# EAGLE board ADC Board (EAGLE 7.6.0)
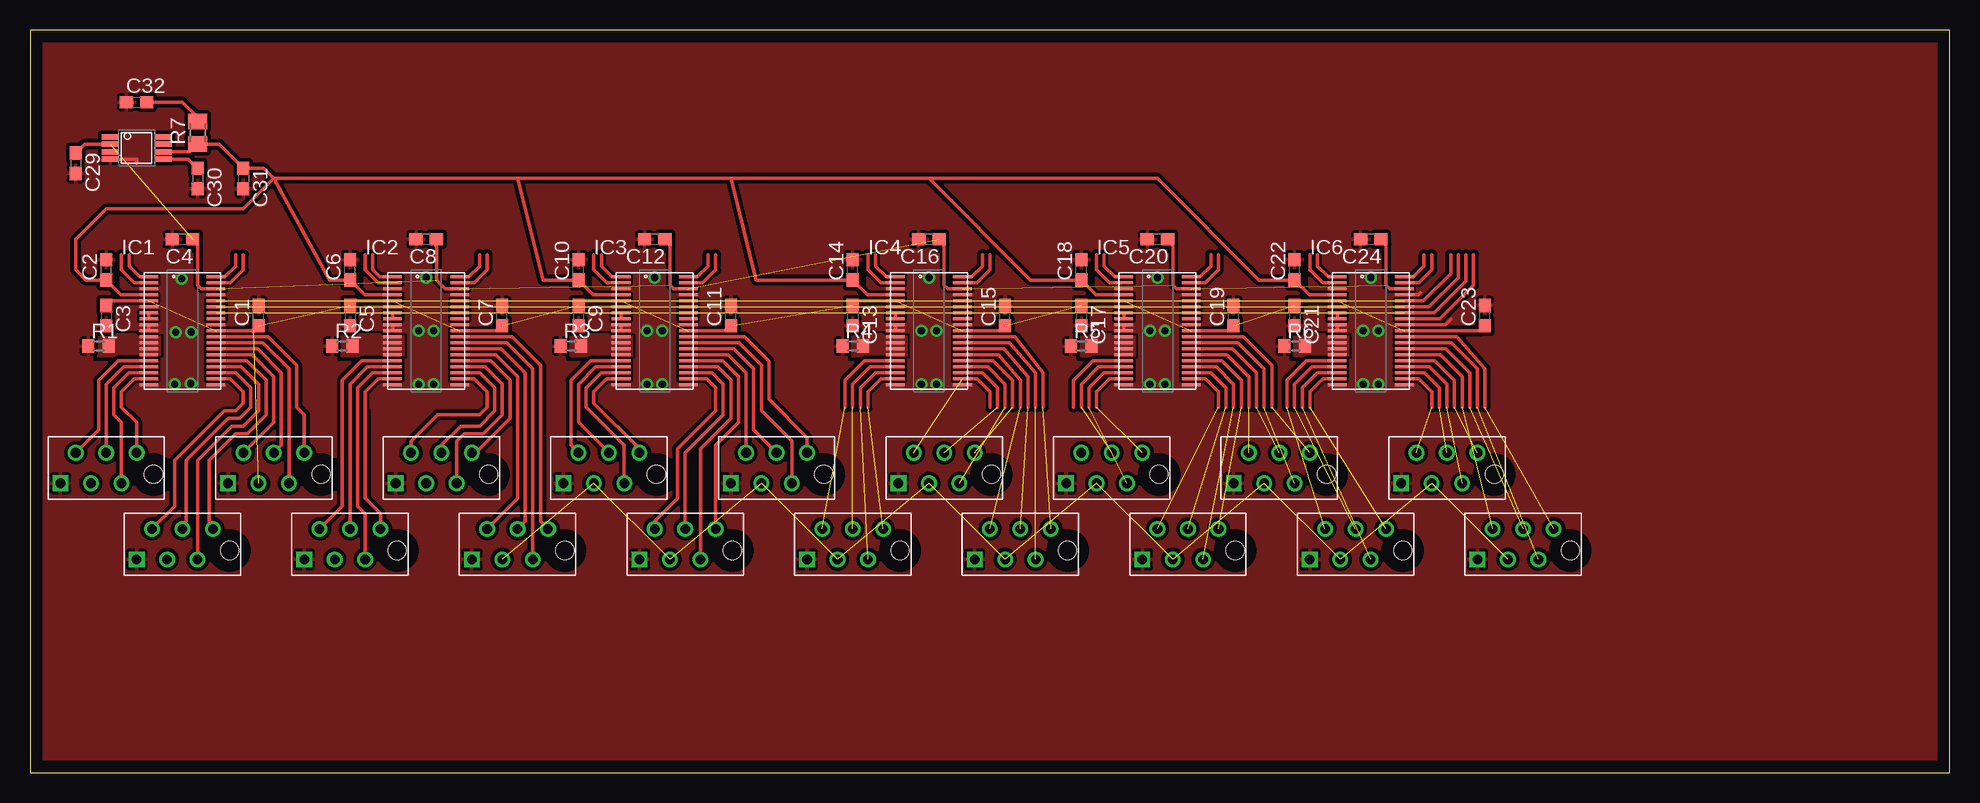
[diagram p0: board, top side]
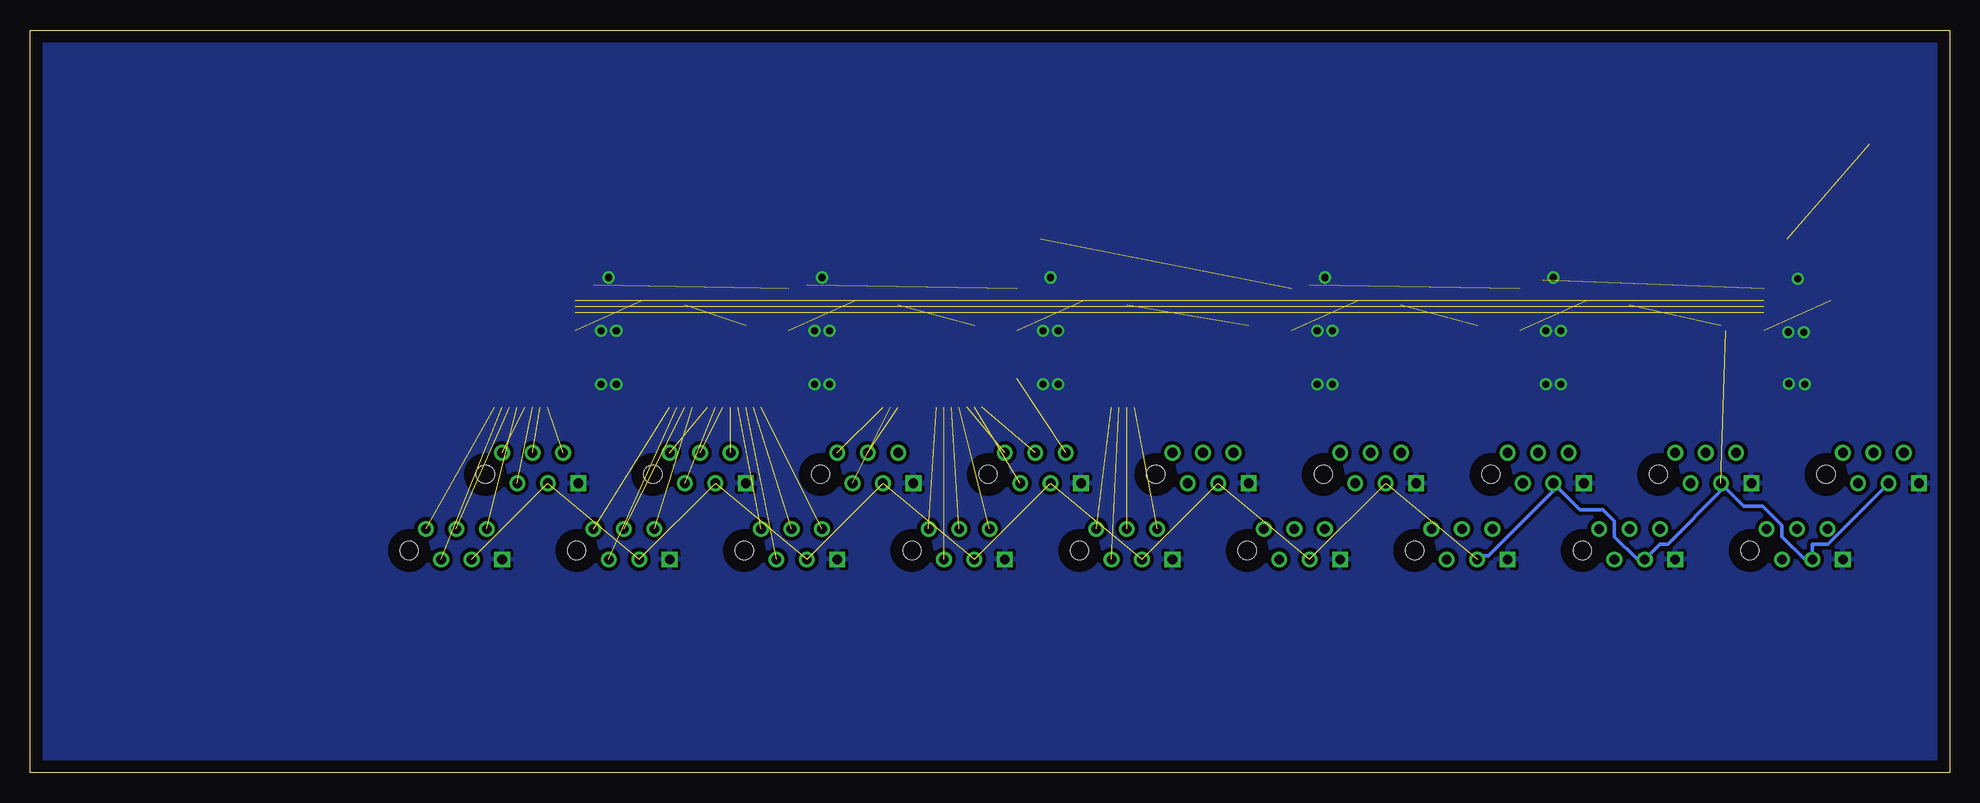
[diagram p1: board, bottom side, seen from below]

Size 160 x 61.9 mm. Coordinates in mm from the lower left corner, seen from the top.
Outline: 0,0 160,0 160,61.9 0,61.9 0,0
Copper layers (1*16): Top 0.035mm / dielectric 1.5mm / Bottom 0.035mm
Design rules "default": minimum track width 10mil, minimum drill 24mil, track to track 8mil, track to pad 8mil, pad to pad 8mil, via to via 8mil, smd to smd 8mil, copper to edge 40mil, drill to drill 8mil, minimum pad ring 10mil, minimum via ring 8mil, stop-mask expansion 4mil, vias tented up to drill 0mil, thermal gap 10mil

## Footprints (pad centres in the part's own frame; a part is rotated, then mirrored left to right if it is on the bottom)
C0603 = smd 1.1 x 1: 1 -0.85,0; 2 0.85,0
TSSOP-38 = smd 1.55 x 0.25: P$1 -2.8,4.5; P$2 -2.8,4; P$3 -2.8,3.5; P$4 -2.8,3; P$5 -2.8,2.5; P$6 -2.8,2; P$7 -2.8,1.5; P$8 -2.8,1; P$9 -2.8,0.5; P$10 -2.8,0; P$11 -2.8,-0.5; P$12 -2.8,-1; P$13 -2.8,-1.5; P$14 -2.8,-2; P$15 -2.8,-2.5; P$16 -2.8,-3; P$17 -2.8,-3.5; P$18 -2.8,-4; P$19 -2.8,-4.5; P$20 2.8,-4.5; P$21 2.8,-4; P$22 2.8,-3.5; P$23 2.8,-3; P$24 2.8,-2.5; P$25 2.8,-2; P$26 2.8,-1.5; P$27 2.8,-1; P$28 2.8,-0.5; P$29 2.8,0; P$30 2.8,0.5; P$31 2.8,1; P$32 2.8,1.5; P$33 2.8,2; P$34 2.8,2.5; P$35 2.8,3; P$36 2.8,3.5; P$37 2.8,4; P$38 2.8,4.5
R0603 = smd 1 x 1.1: 1 -0.85,0; 2 0.85,0
M0805 = smd 1.3 x 1.6: 1 -0.95,0; 2 0.95,0
TSSOP-8(TI) = smd 0.45 x 1.45: P$1 -0.925,-2.2; P$2 -0.325,-2.2; P$3 0.325,-2.2; P$4 0.925,-2.2; P$5 0.925,2.2; P$6 0.325,2.2; P$7 -0.325,2.2; P$8 -0.925,2.2
2178710_IDC = drill 0.8 square: P$1 -3.81,-2.54 | drill 0.8: P$2 -1.27,-2.54; P$3 2.54,0; P$4 1.27,-2.54; P$5 0,0; P$6 -2.54,0 | hole 1.5: 3.94,-1.8

## Placement (x,y rotation side)
C1  1uF  [C0603]  19.05,38.1 90 top
C2  10uF  [C0603]  6.35,41.91 90 top
C3  1uF  [C0603]  6.35,38.1 270 top
C4  1uF  [C0603]  12.7,44.45 180 top
C5  1uF  [C0603]  26.67,38.1 270 top
C6  10uF  [C0603]  26.67,41.91 90 top
C7  1uF  [C0603]  39.37,38.1 90 top
C8  1uF  [C0603]  33.02,44.45 180 top
C9  1uF  [C0603]  45.72,38.1 270 top
C10  10uF  [C0603]  45.72,41.91 90 top
C11  1uF  [C0603]  58.42,38.1 90 top
C12  1uF  [C0603]  52.07,44.45 180 top
C13  1uF  [C0603]  68.58,38.1 270 top
C14  10uF  [C0603]  68.58,41.91 90 top
C15  1uF  [C0603]  81.28,38.1 90 top
C16  1uF  [C0603]  74.93,44.45 180 top
C17  1uF  [C0603]  87.63,38.1 270 top
C18  10uF  [C0603]  87.63,41.91 90 top
C19  1uF  [C0603]  100.33,38.1 90 top
C20  1uF  [C0603]  93.98,44.45 180 top
C21  1uF  [C0603]  105.41,38.1 270 top
C22  10uF  [C0603]  105.41,41.91 90 top
C23  1uF  [C0603]  121.28,38.1 90 top
C24  1uF  [C0603]  111.76,44.45 180 top
C29  1uF  [C0603]  3.81,50.8 270 top
C30  1uF  [C0603]  13.97,49.53 270 top
C31  1uF  [C0603]  17.78,49.53 270 top
C32  22uF  [C0603]  8.89,55.88 0 top
IC1  ADS7956  [TSSOP-38]  12.7,36.83 0 top
IC2  ADS7956  [TSSOP-38]  33.02,36.83 0 top
IC3  ADS7956  [TSSOP-38]  52.07,36.83 0 top
IC4  ADS7956  [TSSOP-38]  74.93,36.83 0 top
IC5  ADS7956  [TSSOP-38]  93.98,36.83 0 top
IC6  ADS7956  [TSSOP-38]  111.76,36.83 0 top
R1  10k  [R0603]  5.71,35.56 0 top
R2  10k  [R0603]  26.04,35.56 0 top
R3  10k  [R0603]  45.09,35.56 0 top
R4  10k  [R0603]  68.58,35.56 0 top
R5  10k  [R0603]  87.63,35.56 0 top
R6  10k  [R0603]  105.41,35.56 0 top
R7  1  [M0805]  13.97,53.34 90 top
U$1  REF5025  [TSSOP-8(TI)]  8.89,52.07 270 top
X1  6_PIN_CONNTE_IDC  [2178710_IDC]  20.32,26.67 0 top
X2  6_PIN_CONNTE_IDC  [2178710_IDC]  12.7,20.32 0 top
X3  6_PIN_CONNTE_IDC  [2178710_IDC]  6.35,26.67 0 top
X4  6_PIN_CONNTE_IDC  [2178710_IDC]  62.23,26.67 0 top
X5  6_PIN_CONNTE_IDC  [2178710_IDC]  54.61,20.32 0 top
X6  6_PIN_CONNTE_IDC  [2178710_IDC]  48.26,26.67 0 top
X7  6_PIN_CONNTE_IDC  [2178710_IDC]  82.55,20.32 0 top
X8  6_PIN_CONNTE_IDC  [2178710_IDC]  76.2,26.67 0 top
X9  6_PIN_CONNTE_IDC  [2178710_IDC]  68.58,20.32 0 top
X10  6_PIN_CONNTE_IDC  [2178710_IDC]  40.64,20.32 0 top
X11  6_PIN_CONNTE_IDC  [2178710_IDC]  34.29,26.67 0 top
X12  6_PIN_CONNTE_IDC  [2178710_IDC]  26.67,20.32 0 top
X13  6_PIN_CONNTE_IDC  [2178710_IDC]  104.14,26.67 0 top
X14  6_PIN_CONNTE_IDC  [2178710_IDC]  96.52,20.32 0 top
X15  6_PIN_CONNTE_IDC  [2178710_IDC]  90.17,26.67 0 top
X16  6_PIN_CONNTE_IDC  [2178710_IDC]  124.46,20.32 0 top
X17  6_PIN_CONNTE_IDC  [2178710_IDC]  118.11,26.67 0 top
X18  6_PIN_CONNTE_IDC  [2178710_IDC]  110.49,20.32 0 top

## Library data of the parts
C1-C24 C29-C32 R7 = adafruit
IC1-IC6 U$1 X1-X18 = BMS Lbr
R1-R6 = resistor

## Nets
2.5VREF: C2.1 C6.1 C10.1 C14.1 C18.1 C22.1 C31.1 IC1.P$4 IC2.P$4 IC3.P$4 IC4.P$4 IC5.P$4 IC6.P$4 R7.1 U$1.P$6
A_INPUT0: IC1.P$7 IC1.P$8
A_INPUT1: IC2.P$7 IC2.P$8
A_INPUT2: IC3.P$7 IC3.P$8
A_INPUT3: IC5.P$7 IC5.P$8
A_INPUT4: IC4.P$7 IC4.P$8
A_INPUT5: IC6.P$7 IC6.P$8
AI47: IC5.P$15
AIN0: IC1.P$28 X1.P$3
AIN1: IC1.P$27 X1.P$4
AIN2: IC1.P$26 X1.P$5
AIN3: IC1.P$25 X1.P$6
AIN4: IC1.P$24 X2.P$3
AIN5: IC1.P$23 X2.P$4
AIN6: IC1.P$22 X2.P$5
AIN7: IC1.P$21 X2.P$6
AIN8: IC1.P$18 X3.P$3
AIN9: IC1.P$17 X3.P$4
AIN10: IC1.P$16 X3.P$5
AIN11: IC1.P$15 X3.P$6
AIN12: IC2.P$28 X10.P$3
AIN13: IC2.P$27 X10.P$4
AIN14: IC2.P$26 X10.P$5
AIN15: IC2.P$25 X10.P$6
AIN16: IC2.P$24 X11.P$3
AIN17: IC2.P$23 X11.P$4
AIN18: IC2.P$22 X11.P$5
AIN19: IC2.P$21 X11.P$6
AIN20: IC2.P$18 X12.P$3
AIN21: IC2.P$17 X12.P$4
AIN22: IC2.P$16 X12.P$5
AIN23: IC2.P$15 X12.P$6
AIN24: IC3.P$28 X4.P$3
AIN25: IC3.P$27 X4.P$4
AIN26: IC3.P$26 X4.P$5
AIN27: IC3.P$25 X4.P$6
AIN28: IC3.P$24 X5.P$3
AIN29: IC3.P$23 X5.P$4
AIN30: IC3.P$22 X5.P$5
AIN31: IC3.P$21 X5.P$6
AIN32: IC3.P$18 X6.P$3
AIN33: IC3.P$17 X6.P$4
AIN34: IC3.P$16 X6.P$5
AIN35: IC3.P$15 X6.P$6
AIN36: IC5.P$28 X13.P$3
AIN37: IC5.P$27 X13.P$4
AIN38: IC5.P$26 X13.P$5
AIN39: IC5.P$25 X13.P$6
AIN40: IC5.P$24 X14.P$3
AIN41: IC5.P$23 X14.P$4
AIN42: IC5.P$22 X14.P$5
AIN43: IC5.P$21 X14.P$6
AIN44: IC5.P$18 X15.P$3
AIN45: IC5.P$17 X15.P$4
AIN46: IC5.P$16 X15.P$5
AIN47: X15.P$6
AIN48: IC4.P$28 X7.P$3
AIN49: IC4.P$27 X7.P$4
AIN50: IC4.P$26 X7.P$5
AIN51: IC4.P$25 X7.P$6
AIN52: IC4.P$24 X8.P$3
AIN53: IC4.P$23 X8.P$4
AIN54: IC4.P$22 X8.P$5
AIN55: IC4.P$21 X8.P$6
AIN56: IC4.P$18 X9.P$3
AIN57: IC4.P$17 X9.P$4
AIN58: IC4.P$16 X9.P$5
AIN59: IC4.P$15 X9.P$6
AIN60: IC6.P$28 X16.P$3
AIN61: IC6.P$27 X16.P$4
AIN62: IC6.P$26 X16.P$5
AIN63: IC6.P$25 X16.P$6
AIN64: IC6.P$24 X17.P$3
AIN65: IC6.P$23 X17.P$4
AIN66: IC6.P$22 X17.P$5
AIN67: IC6.P$21 X17.P$6
AIN68: IC6.P$18 X18.P$3
AIN69: IC6.P$17 X18.P$4
AIN70: IC6.P$16 X18.P$5
AIN71: IC6.P$15 X18.P$6
CS0: IC1.P$31
CS1: IC2.P$31
CS2: IC3.P$31
CS3: IC5.P$31
CS4: IC4.P$31
CS5: IC6.P$31
GND: C1.2 C2.2 C3.2 C4.2 C5.2 C6.2 C7.2 C8.2 C9.2 C10.2 C11.2 C12.2 C13.2 C14.2 C15.2 C16.2 C17.2 C18.2 C19.2 C20.2 C21.2 C22.2 C23.2 C24.2 C29.2 C30.2 C31.2 C32.1 IC1.P$3 IC1.P$6 IC1.P$9 IC1.P$10 IC1.P$19 IC1.P$20 IC1.P$30 IC1.P$35 IC2.P$3 IC2.P$6 IC2.P$9 IC2.P$10 IC2.P$19 IC2.P$20 IC2.P$30 IC2.P$35 IC3.P$3 IC3.P$6 IC3.P$9 IC3.P$10 IC3.P$19 IC3.P$20 IC3.P$30 IC3.P$35 IC4.P$3 IC4.P$6 IC4.P$9 IC4.P$10 IC4.P$19 IC4.P$20 IC4.P$30 IC4.P$35 IC5.P$3 IC5.P$6 IC5.P$9 IC5.P$10 IC5.P$19 IC5.P$20 IC5.P$30 IC5.P$35 IC6.P$3 IC6.P$6 IC6.P$9 IC6.P$10 IC6.P$19 IC6.P$20 IC6.P$30 IC6.P$35 R1.1 R2.1 R3.1 R4.1 R5.1 R6.1 U$1.P$4 X1.P$1 X2.P$1 X3.P$1 X4.P$1 X5.P$1 X6.P$1 X7.P$1 X8.P$1 X9.P$1 X10.P$1 X11.P$1 X12.P$1 X13.P$1 X14.P$1 X15.P$1 X16.P$1 X17.P$1 X18.P$1
GPIO0: IC1.P$37
GPIO1: IC1.P$38
GPIO2: IC1.P$1
GPIO3: IC1.P$2
GPIO4: IC2.P$37
GPIO5: IC2.P$38
GPIO6: IC2.P$2
GPIO7: IC2.P$1
GPIO8: IC3.P$37
GPIO9: IC3.P$38
GPIO10: IC3.P$2
GPIO11: IC3.P$1
GPIO12: IC5.P$37
GPIO13: IC5.P$38
GPIO14: IC5.P$2
GPIO15: IC5.P$1
GPIO16: IC4.P$37
GPIO17: IC4.P$38
GPIO18: IC4.P$2
GPIO19: IC4.P$1
GPIO20: IC6.P$37
GPIO21: IC6.P$38
GPIO22: IC6.P$1
GPIO23: IC6.P$2
N$3: C32.2 R7.2
NC: IC1.P$11 IC1.P$12 IC1.P$13 IC1.P$14 R1.2
NC1: IC2.P$11 IC2.P$12 IC2.P$13 IC2.P$14 R2.2
NC2: IC3.P$11 IC3.P$12 IC3.P$13 IC3.P$14 R3.2
NC3: IC4.P$11 IC4.P$12 IC4.P$13 IC4.P$14 R4.2
NC4: IC5.P$11 IC5.P$12 IC5.P$13 IC5.P$14 R5.2
NC5: IC6.P$11 IC6.P$12 IC6.P$13 IC6.P$14 R6.2
SCLK: IC1.P$32 IC2.P$32 IC3.P$32 IC4.P$32 IC5.P$32 IC6.P$32
SDI: IC1.P$33 IC2.P$33 IC3.P$33 IC4.P$33 IC5.P$33 IC6.P$33
SDO: IC1.P$34 IC2.P$34 IC3.P$34 IC4.P$34 IC5.P$34 IC6.P$34
TRIM: C30.1 U$1.P$5
VA: C1.1 C3.1 C5.1 C7.1 C9.1 C11.1 C13.1 C15.1 C17.1 C19.1 C21.1 C23.1 IC1.P$5 IC1.P$29 IC2.P$5 IC2.P$29 IC3.P$5 IC3.P$29 IC4.P$5 IC4.P$29 IC5.P$5 IC5.P$29 IC6.P$5 IC6.P$29 X1.P$2 X2.P$2 X3.P$2 X4.P$2 X5.P$2 X6.P$2 X7.P$2 X8.P$2 X9.P$2 X10.P$2 X11.P$2 X12.P$2 X13.P$2 X14.P$2 X15.P$2 X16.P$2 X17.P$2 X18.P$2
VCC: C4.1 C8.1 C12.1 C16.1 C20.1 C24.1 C29.1 IC1.P$36 IC2.P$36 IC3.P$36 IC4.P$36 IC5.P$36 IC6.P$36 U$1.P$2

## Tracks (layer width: path | path; a pad name or v marks a point on that pad's centre or on a via)
2.5VREF
  Top 0.305: IC1.P$4 7.58,39.83 C2.1 4.66,41.06 3.81,41.91 3.81,44.45 6.35,46.99 17.78,46.99 20.32,49.53 | IC2.P$4 27.9,39.83 C6.1 24.98,41.06 20.32,49.53 | IC3.P$4 46.95,39.83 C10.1 42.76,41.06 40.64,49.53 | IC4.P$4 69.81,39.83 C14.1 60.54,41.06 58.42,49.53 | IC5.P$4 88.86,39.83 C18.1 83.4,41.06 74.93,49.53 | IC6.P$4 106.64,39.83 C22.1 102.45,41.06 93.98,49.53 74.93,49.53 | U$1.P$6 13.32,51.74 R7.1 15.77,52.39 C31.1 19.47,50.38 20.32,49.53 | 58.42,49.53 40.64,49.53 | 40.64,49.53 20.32,49.53 | 74.93,49.53 58.42,49.53
A_INPUT0
  Top 0.305: IC1.P$8 IC1.P$7
A_INPUT1
  Top 0.305: IC2.P$7 IC2.P$8
A_INPUT2
  Top 0.305: IC3.P$7 IC3.P$8
A_INPUT3
  Top 0.305: IC5.P$8 IC5.P$7
A_INPUT4
  Top 0.305: IC4.P$7 IC4.P$8
A_INPUT5
  Top 0.305: IC6.P$7 IC6.P$8
AI47
  Top 0.305: IC5.P$15 88.62,34.33 87,32.7 87,30.48
AIN0
  Top 0.305: IC1.P$28 19.87,36.33 22.23,33.97 22.23,30.48 22.86,29.84 X1.P$3
AIN1
  Top 0.305: IC1.P$27 19.41,35.83 21.59,33.66 X1.P$4
AIN2
  Top 0.305: IC1.P$26 18.96,35.33 20.95,33.34 20.95,27.3 X1.P$5
AIN3
  Top 0.305: IC1.P$25 18.51,34.83 20.32,33.02 20.32,29.21 X1.P$6
AIN4
  Top 0.305: IC1.P$24 18.06,34.33 19.68,32.7 19.68,29.84 18.1,28.26 17.14,28.26 14.92,26.04 14.92,20.64 X2.P$3
AIN5
  Top 0.305: IC1.P$23 17.61,33.83 19.05,32.38 19.05,30.16 17.78,28.89 16.83,28.89 13.97,26.04 X2.P$4
AIN6
  Top 0.305: IC1.P$22 17.15,33.33 18.41,32.07 18.41,30.48 17.46,29.53 16.51,29.53 13.02,26.04 13.02,20.95 12.7,20.64 X2.P$5
AIN7
  Top 0.305: IC1.P$21 16.7,32.83 17.78,31.75 17.78,30.8 17.14,30.16 16.19,30.16 12.06,26.04 12.06,22.23 X2.P$6
AIN8
  Top 0.305: IC1.P$18 8.7,32.83 7.62,31.75 7.62,30.48 8.89,29.21 X3.P$3
AIN9
  Top 0.305: IC1.P$17 8.25,33.33 6.99,32.07 6.99,29.84 7.62,29.21 X3.P$4
AIN10
  Top 0.305: IC1.P$16 7.79,33.83 6.35,32.38 X3.P$5
AIN11
  Top 0.305: IC1.P$15 7.34,34.33 5.71,32.7 5.71,28.57 X3.P$6
AIN12
  Top 0.305: IC2.P$28 40.19,36.33 42.55,33.97 42.55,20.95 X10.P$3
AIN13
  Top 0.305: IC2.P$27 39.73,35.83 41.91,33.66 X10.P$4
AIN14
  Top 0.305: IC2.P$26 39.28,35.33 41.27,33.34 41.27,20.95 X10.P$5
AIN15
  Top 0.305: IC2.P$25 38.83,34.83 40.64,33.02 40.64,22.86 X10.P$6
AIN16
  Top 0.305: IC2.P$24 38.38,34.33 40.01,32.7 40.01,29.53 37.15,26.67 X11.P$3
AIN17
  Top 0.305: IC2.P$23 37.92,33.83 39.37,32.38 39.37,29.84 37.78,28.26 36.2,28.26 35.56,27.62 X11.P$4
AIN18
  Top 0.305: IC2.P$22 37.47,33.33 38.73,32.07 38.73,30.16 37.47,28.89 35.88,28.89 34.29,27.3 X11.P$5
AIN19
  Top 0.305: IC2.P$21 37.02,32.83 38.1,31.75 38.1,30.48 37.47,29.84 33.97,29.84 31.75,27.62 X11.P$6
AIN20
  Top 0.305: IC2.P$18 29.02,32.83 27.94,31.75 27.94,22.86 29.21,21.59 X12.P$3
AIN21
  Top 0.305: IC2.P$17 28.57,33.33 27.3,32.07 27.3,22.23 27.94,21.59 X12.P$4
AIN22
  Top 0.305: IC2.P$16 28.11,33.83 26.67,32.38 X12.P$5
AIN23
  Top 0.305: IC2.P$15 27.66,34.33 26.04,32.7 26.04,22.23 X12.P$6
AIN24
  Top 0.305: IC3.P$28 59.55,36.33 61.59,34.29 61.59,31.11 64.77,27.94 X4.P$3
AIN25
  Top 0.305: IC3.P$27 59.1,35.83 60.96,33.97 60.96,30.16 63.5,27.62 X4.P$4
AIN26
  Top 0.305: IC3.P$26 58.65,35.33 60.33,33.66 60.33,28.57 X4.P$5
AIN27
  Top 0.305: IC3.P$25 58.2,34.83 59.69,33.34 X4.P$6
AIN28
  Top 0.305: IC3.P$24 57.74,34.33 59.05,33.02 59.05,29.21 57.15,27.3 X5.P$3
AIN29
  Top 0.305: IC3.P$23 57.29,33.83 58.42,32.7 58.42,29.53 55.88,26.99 X5.P$4
AIN30
  Top 0.305: IC3.P$22 56.84,33.33 57.78,32.38 57.78,29.84 54.61,26.67 X5.P$5
AIN31
  Top 0.305: IC3.P$21 56.39,32.83 57.15,32.07 57.15,30.16 53.98,26.99 53.98,22.86 52.07,20.95 X5.P$6
AIN32
  Top 0.305: IC3.P$18 48.07,32.83 46.99,31.75 46.99,30.8 50.8,26.99 X6.P$3
AIN33
  Top 0.305: IC3.P$17 47.62,33.33 46.35,32.07 46.35,30.48 49.53,27.3 X6.P$4
AIN34
  Top 0.305: IC3.P$16 47.16,33.83 45.72,32.38 45.72,29.21 X6.P$5
AIN35
  Top 0.305: IC3.P$15 46.71,34.33 45.09,32.7 45.09,27.3 X6.P$6
AIN36  (1 unrouted)
  Top 0.305: IC5.P$28 101.15,36.33 103.5,33.97 103.5,30.48
AIN37  (1 unrouted)
  Top 0.305: IC5.P$27 100.69,35.83 102.87,33.66 102.87,30.48
AIN38  (1 unrouted)
  Top 0.305: IC5.P$26 100.24,35.33 102.23,33.34 102.23,30.48
AIN39  (1 unrouted)
  Top 0.305: IC5.P$25 99.79,34.83 101.6,33.02 101.6,30.48
AIN40  (1 unrouted)
  Top 0.305: IC5.P$24 99.34,34.33 100.97,32.7 100.97,30.48
AIN41  (1 unrouted)
  Top 0.305: IC5.P$23 98.89,33.83 100.33,32.38 100.33,30.48
AIN42  (1 unrouted)
  Top 0.305: IC5.P$22 98.43,33.33 99.69,32.07 99.69,30.48
AIN43  (1 unrouted)
  Top 0.305: IC5.P$21 97.98,32.83 99.06,31.75 99.06,30.48
AIN44  (1 unrouted)
  Top 0.305: IC5.P$18 89.98,32.83 88.9,31.75 88.9,30.48
AIN45  (1 unrouted)
  Top 0.305: IC5.P$17 89.53,33.33 88.27,32.07 88.27,30.48
AIN46  (1 unrouted)
  Top 0.305: IC5.P$16 89.08,33.83 87.63,32.38 87.63,30.48
AIN48  (1 unrouted)
  Top 0.305: IC4.P$28 82.1,36.33 84.45,33.34 84.45,30.48
AIN49  (1 unrouted)
  Top 0.305: IC4.P$27 81.64,35.83 83.82,33.34 83.82,30.48
AIN50  (1 unrouted)
  Top 0.305: IC4.P$26 81.19,35.33 83.19,33.02 83.19,30.48
AIN51  (1 unrouted)
  Top 0.305: IC4.P$25 80.74,34.83 82.55,32.7 82.55,30.48
AIN52  (1 unrouted)
  Top 0.305: IC4.P$24 80.29,34.33 81.92,32.7 81.92,30.48
AIN53  (1 unrouted)
  Top 0.305: IC4.P$23 79.83,33.83 81.28,32.38 81.28,30.48
AIN54  (1 unrouted)
  Top 0.305: IC4.P$22 79.38,33.33 80.64,32.07 80.64,30.48
AIN55  (1 unrouted)
  Top 0.305: IC4.P$21 78.93,32.83 80.01,31.75 80.01,30.48
AIN56  (1 unrouted)
  Top 0.305: IC4.P$18 70.93,32.83 69.85,31.75 69.85,30.48
AIN57  (1 unrouted)
  Top 0.305: IC4.P$17 70.48,33.33 69.22,32.07 69.22,30.48
AIN58  (1 unrouted)
  Top 0.305: IC4.P$16 70.03,33.83 68.58,32.38 68.58,30.48
AIN59  (1 unrouted)
  Top 0.305: IC4.P$15 69.57,34.33 67.94,32.7 67.94,30.48
AIN60  (1 unrouted)
  Top 0.305: IC6.P$28 118.93,36.33 121.28,33.66 121.28,30.48
AIN61  (1 unrouted)
  Top 0.305: IC6.P$27 118.47,35.83 120.65,33.66 120.65,30.48
AIN62  (1 unrouted)
  Top 0.305: IC6.P$26 118.02,35.33 120.02,33.34 120.02,30.48
AIN63  (1 unrouted)
  Top 0.305: IC6.P$25 117.57,34.83 119.38,33.02 119.38,30.48
AIN64  (1 unrouted)
  Top 0.305: IC6.P$24 117.12,34.33 118.75,32.7 118.75,30.48
AIN65  (1 unrouted)
  Top 0.305: IC6.P$23 116.67,33.83 118.11,32.38 118.11,30.48
AIN66  (1 unrouted)
  Top 0.305: IC6.P$22 116.21,33.33 117.47,32.07 117.47,30.48
AIN67  (1 unrouted)
  Top 0.305: IC6.P$21 115.76,32.83 116.84,31.75 116.84,30.48
AIN68  (1 unrouted)
  Top 0.305: IC6.P$18 107.76,32.83 106.68,31.75 106.68,30.48
AIN69  (1 unrouted)
  Top 0.305: IC6.P$17 107.31,33.33 106.05,32.07 106.05,30.48
AIN70  (1 unrouted)
  Top 0.305: IC6.P$16 106.86,33.83 105.41,32.38 105.41,30.48
AIN71  (1 unrouted)
  Top 0.305: IC6.P$15 106.4,34.33 104.78,32.7 104.78,30.48
CS5
  Top 0.305: IC6.P$31 117.52,37.83 120.33,40.64 120.33,43.18
GND  (via drill 0.6)
  Top 0.305: IC2.P$9 IC2.P$10 | IC3.P$9 IC3.P$10 | IC4.P$9 IC4.P$10 | IC5.P$9 IC5.P$10 | IC6.P$9 IC6.P$10 | IC1.P$9 IC1.P$10 | U$1.P$4 8.89,51.15 8.89,50.8 | IC6.P$30 117.97,37.33 118.43,37.78 | IC6.P$35 115.71,39.83 115.89,40.01
  other vias: 12.06,32.38 13.39,32.44 12.14,36.7 13.44,36.73 12.65,41.17 32.38,32.38 33.66,32.38 32.38,36.83 33.66,36.83 33.02,41.27 51.44,32.38 52.7,32.38 52.7,36.83 51.44,36.83 52.07,41.27 74.93,41.27 74.3,36.83 75.56,36.83 75.56,32.38 74.3,32.38 93.98,41.27 93.34,36.83 94.61,36.83 94.61,32.38 93.34,32.38 111.76,41.27 112.39,36.83 111.12,36.83 111.12,32.38 112.39,32.38
  pour Top (rank 6, no thermals): 7.62,30.48 17.78,30.48 17.78,43.18 7.62,43.18
  pour Bottom (isolate 0.305, rank 6): 0,0 160.02,0 160.02,62.23 0,62.23
  pour Top (isolate 0.305, rank 5): 0,0 160.02,0 160.02,62.23 0,62.23
  pour Top (rank 6, no thermals): 27.94,30.48 38.1,30.48 38.1,43.18 27.94,43.18
  pour Top (rank 6, no thermals): 46.99,30.48 57.15,30.48 57.15,43.18 46.99,43.18
  pour Top (rank 6, no thermals): 69.85,30.48 80.01,30.48 80.01,43.18 69.85,43.18
  pour Top (rank 6, no thermals): 88.9,30.48 99.06,30.48 99.06,43.18 88.9,43.18
  pour Top (rank 6, no thermals): 106.68,30.48 116.84,30.48 116.84,43.18 106.68,43.18
GPIO0
  Top 0.305: IC1.P$37 16.7,40.83 17.78,41.91 17.78,43.18
GPIO1
  Top 0.305: IC1.P$38 16.25,41.33 17.14,42.23 17.14,43.18
GPIO2
  Top 0.305: IC1.P$1 9.15,41.33 8.26,42.23 8.26,43.18
GPIO3
  Top 0.305: IC1.P$2 8.7,40.83 7.62,41.91 7.62,43.18
GPIO4
  Top 0.305: IC2.P$37 37.02,40.83 38.1,41.91 38.1,43.18
GPIO5
  Top 0.305: IC2.P$38 36.57,41.33 37.47,42.23 37.47,43.18
GPIO6
  Top 0.305: IC2.P$2 29.02,40.83 27.94,41.91 27.94,43.18
GPIO7
  Top 0.305: IC2.P$1 29.16,41.33 28.57,41.91 28.57,43.18
GPIO8
  Top 0.305: IC3.P$37 56.07,40.83 57.15,41.91 57.15,43.18
GPIO9
  Top 0.305: IC3.P$38 55.62,41.33 56.52,42.23 56.52,43.18
GPIO10
  Top 0.305: IC3.P$2 48.07,40.83 46.99,41.91 46.99,43.18
GPIO11
  Top 0.305: IC3.P$1 48.52,41.33 47.62,42.23 47.62,43.18
GPIO12
  Top 0.305: IC5.P$37 97.98,40.83 99.06,41.91 99.06,43.18
GPIO13
  Top 0.305: IC5.P$38 97.53,41.33 98.42,42.23 98.42,43.18
GPIO14
  Top 0.305: IC5.P$2 89.98,40.83 88.9,41.91 88.9,43.18
GPIO15
  Top 0.305: IC5.P$1 90.43,41.33 89.53,42.23 89.53,43.18
GPIO16
  Top 0.305: IC4.P$37 78.93,40.83 80.01,41.91 80.01,43.18
GPIO17
  Top 0.305: IC4.P$38 78.48,41.33 79.38,42.23 79.38,43.18
GPIO18
  Top 0.305: IC4.P$2 70.93,40.83 69.85,41.91 69.85,43.18
GPIO19
  Top 0.305: IC4.P$1 71.38,41.33 70.48,42.23 70.48,43.18
GPIO20
  Top 0.305: IC6.P$37 115.76,40.83 116.84,41.91 116.84,43.18
GPIO21
  Top 0.305: IC6.P$38 115.31,41.33 116.2,42.23 116.2,43.18
GPIO22
  Top 0.305: IC6.P$1 108.21,41.33 107.31,42.23 107.31,43.18
GPIO23
  Top 0.305: IC6.P$2 107.76,40.83 106.68,41.91 106.68,43.18
N$3
  Top 0.305: R7.2 13.97,54.61 12.7,55.88 C32.2
NC
  pour Top (isolate 0.305, no thermals): 5.46,34.75 10.79,34.75 10.79,36.5 5.51,36.5
NC1
  pour Top (isolate 0.254, no thermals): 31.11,34.75 26.04,34.75 26.04,36.5 31.11,36.5
NC2
  pour Top (isolate 0.254, no thermals): 45.09,36.5 50.16,36.5 50.16,34.75 45.09,34.75
NC3
  pour Top (isolate 0.254, no thermals): 68.58,36.5 73.03,36.5 73.03,34.75 68.58,34.75
NC4
  pour Top (isolate 0.254, no thermals): 87.63,36.5 92.08,36.5 92.08,34.75 87.63,34.75
NC5
  pour Top (isolate 0.254, no thermals): 105.41,36.5 109.86,36.5 109.86,34.75 105.41,34.75
SCLK  (5 unrouted)
  Top 0.305: IC6.P$32 117.07,38.33 119.7,40.96 119.7,43.18
SDI  (5 unrouted)
  Top 0.305: IC6.P$33 116.62,38.83 119.06,41.27 119.06,43.18
SDO  (5 unrouted)
  Top 0.305: IC6.P$34 116.17,39.33 118.43,41.59 118.43,43.18
TRIM
  Top 0.305: U$1.P$5 13.21,51.15 C30.1
VA  (24 unrouted)
  Top 0.305: 18.63,36.83 IC1.P$29 | IC1.P$5 6.73,39.33 | IC2.P$5 27.05,39.33 C5.1 | IC2.P$29 38.95,36.83 C7.1 | IC3.P$29 58,36.83 C11.1 | IC3.P$5 46.1,39.33 C9.1 | IC4.P$5 68.96,39.33 C13.1 | IC4.P$29 80.86,36.83 C15.1 | IC5.P$29 99.91,36.83 C19.1 | IC5.P$5 88.01,39.33 C17.1 | IC6.P$29 120.86,36.83 C23.1 | IC6.P$5 105.79,39.33 C21.1
  Top 0.406: C1.1 18.63,36.83 | 6.73,39.33 C3.1
  Bottom 0.305: X3.P$2 10.16,19.05 11.43,19.05 X2.P$2 12.06,17.78 13.97,19.68 13.97,20.64 15.56,22.23 17.14,22.23 X1.P$2 19.05,23.5 23.5,19.05 24.13,19.05 X12.P$2 26.04,17.78 27.94,19.68 27.94,20.95 28.89,21.91 30.8,21.91 X11.P$2 33.02,23.5 38.42,18.1 39.05,18.1 X10.P$2
VCC  (6 unrouted)
  Top 0.305: U$1.P$2 4.55,52.4 C29.1 | IC2.P$36 34.6,40.33 33.88,41.05 33.88,43.17 C8.1 | IC4.P$36 76.51,40.33 76.2,40.64 76.2,44.03 C16.1 | IC3.P$36 53.65,40.33 53.34,40.64 53.34,44.03 C12.1 | IC5.P$36 95.56,40.33 95.25,40.64 95.25,44.03 C20.1 | IC6.P$36 113.34,40.33 113.03,40.64 113.03,44.03 C24.1 | IC1.P$36 14.28,40.33 13.97,40.64 13.97,44.03 C4.1